# Altium PCB CP100-(5V1A)_Weld_V1.0.PcbDoc
Units mm, origin at the board's own origin, x right, y up, seen from the top; angles counter-clockwise.
Board outline 28 x 43 mm, 2 copper layers (Top Layer, Bottom Layer); 13 components, 13 nets, 42 pads, 0 vias.
Unrouted connection lines stored in the file: 26.
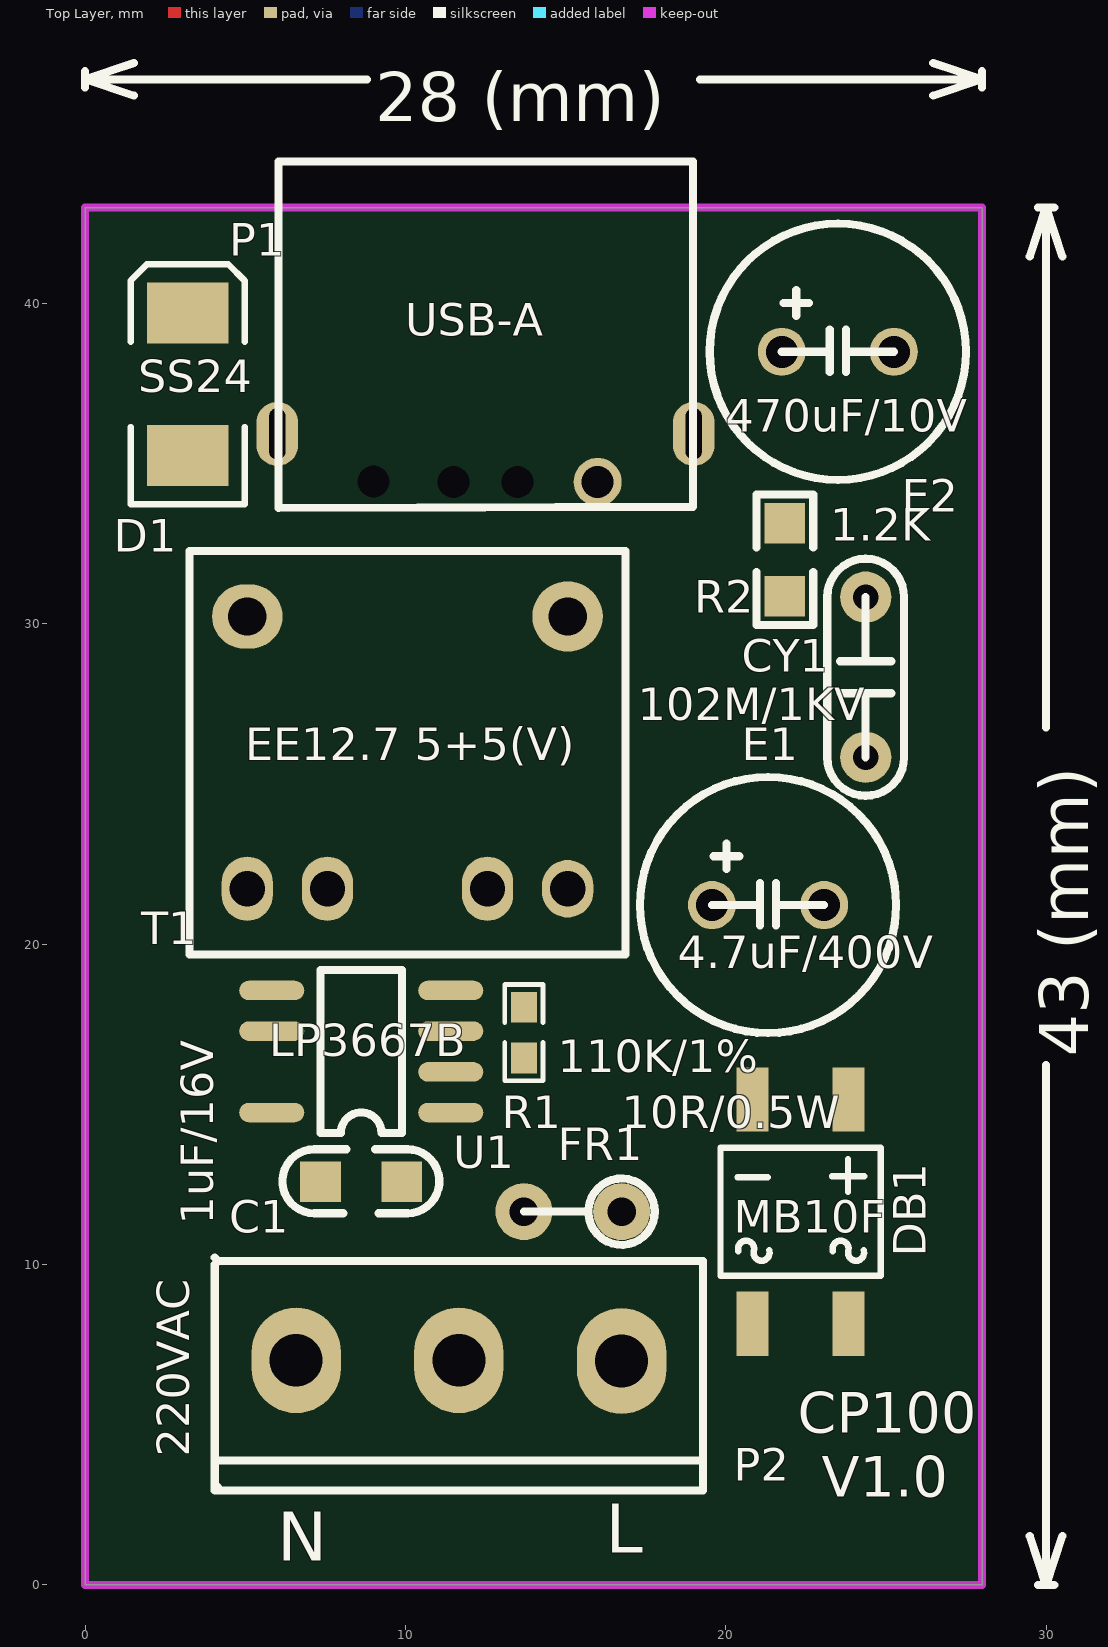
[diagram p0: Top Layer view]
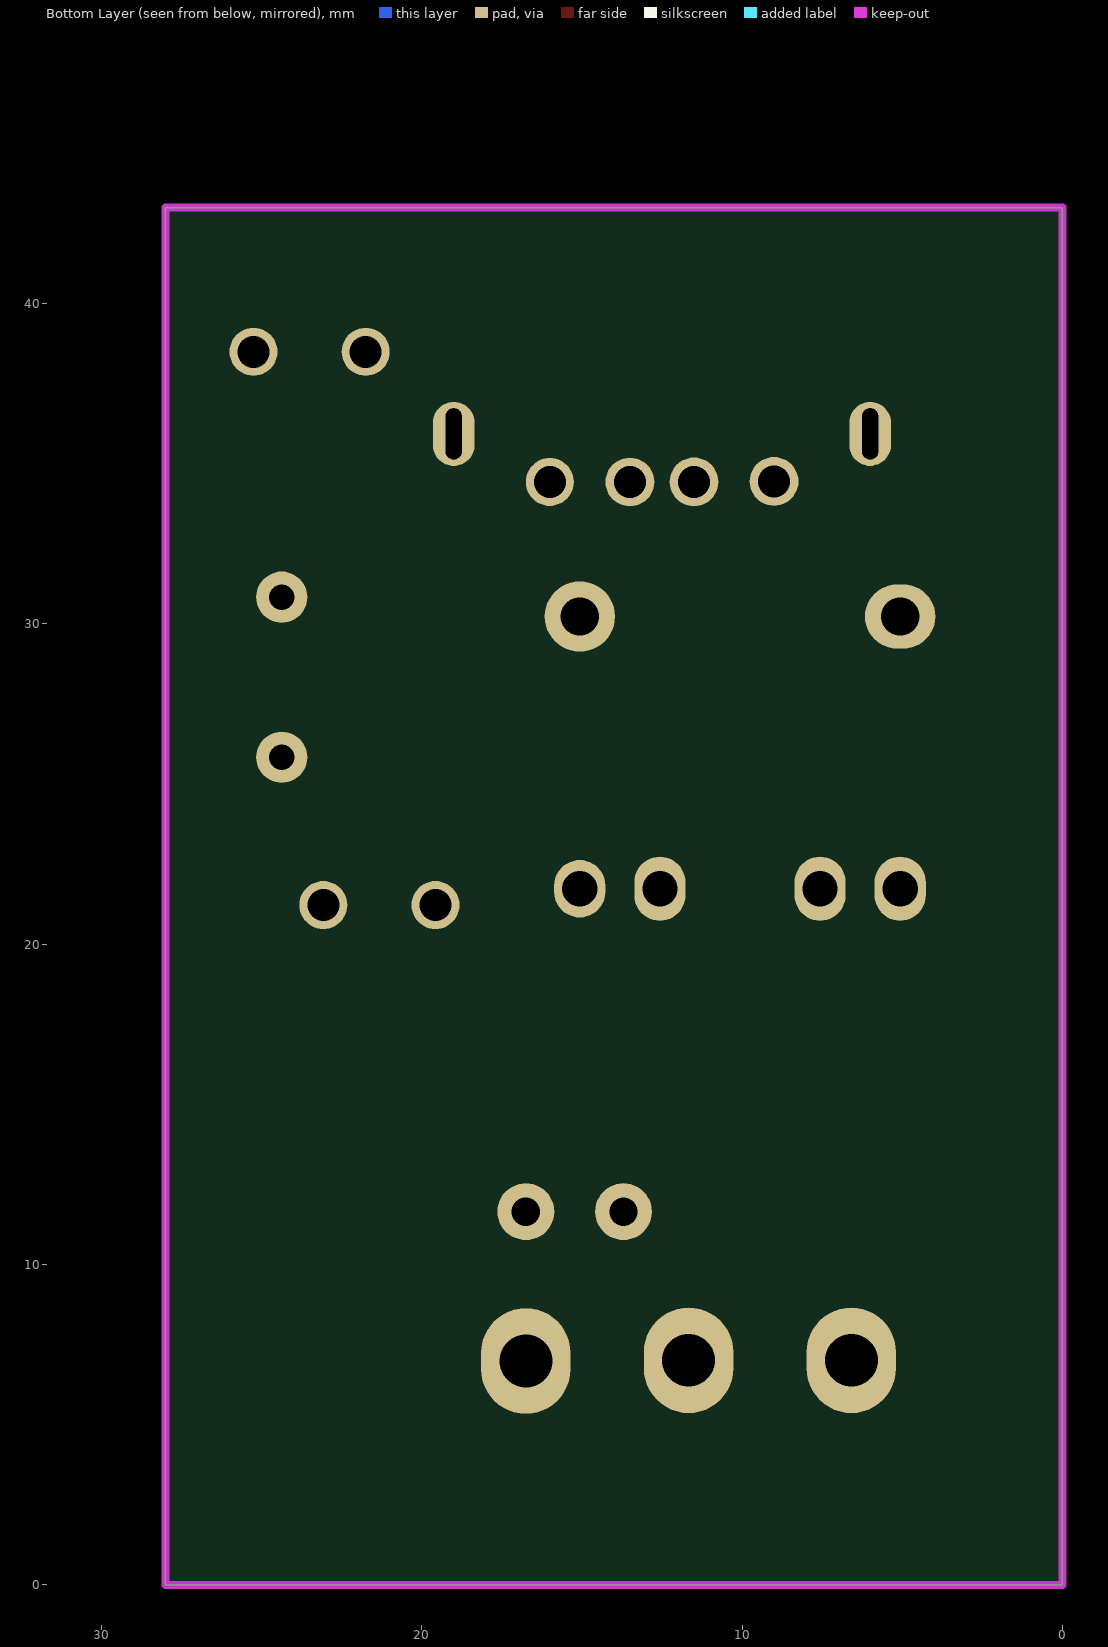
[diagram p1: Bottom Layer view, seen from below]

## Layer stack, top to bottom
Top Layer: signal copper 0.0356
Dielectric: dielectric 0.32, FR-4, Dk 4.8
Bottom Layer: signal copper 0.0356

## Board outline
0,0 0,43 28,43 28,0

## Design rules (kind name [scope] priority, off if disabled: settings)
Clearance "All to Keep-Out Layer" [All vs OnLayer('Keep-Out Layer')] p1: gap=1
Clearance "GND to 5V" [InNet('GND') vs InNet('5V')] p2: gap=0.762
Clearance "GND to All" [InNet('GND')] p3: gap=0.508
Clearance [All] p4: gap=0.254
HoleSize [All] p1: absolutevalues=TRUE maxlimit=25.4 minlimit=0.025 maxpercent=80.000 minpercent=20.000
MinimumSolderMaskSliver [All] p1: minsoldermaskwidth=0
PlaneConnect [All] p1: planeconnectstyle=Direct reliefexpansion=0.508 reliefentries=4 reliefconductorwidth=0.254 reliefairgap=0.254
PolygonConnect [All] p1: connectstyle=Direct reliefconductorwidth=0.254 reliefentries=4 polygonreliefangle="90 Angle"
RoutingVias [All] p1: holewidth=0.711 width=1.27 viastyle="Through Hole" minholewidth=0.711 minwidth=1.27 maxholewidth=0.711 maxwidth=1.27
SilkToSilkClearance [All] p1: silktosilkclearance=0
SilkscreenOverComponentPads [All] p1: minsilkscreentomaskgap=0
SolderMaskExpansion [All] p1: expansion=0.102
Width [All] p1: maxlimit=254 minlimit=0.254 preferedwidth=0.254
23 further rules are at their usual default settings.

## Components (designator, comment, footprint, x,y, rotation, side; value= is the part's Value field where it differs from the comment)
C1 "1uF/16V" 0805_C 8.62,12.588 r180 top
CY1 "102M/1KV" CY-5MM 24.368,28.336 r90 top
D1 "SS24" DO-214AC(SMA) 3.2,37.48 r270 top
DB1 "MB10F" MB10F 22.336,11.652 r90 top (schematic designator BD1)
E1 "4.7uF/400V" CS_220uF/25V 21.32,21.224 r0 top
E2 "470uF/10V" CS_470uF/16V 23.5,38.496 r0 top
FR1 "10R/0.5W" R0.12L 16.748,11.652 r180 top
P1 "USB-A" USB-AF10.6/90 16,34.432 r180 top locked
P2 "220VAC" KF5.08-3P 11.668,7 r180 top locked
R1 "110K/1%" 0603_RN 13.7,17.24 r90 top
R2 "1.2K" 0805_R 21.844,32.004 r90 top
T1 "EE12.7 5+5(V)" "EE12.7 5+5(V)" 5.064,21.732 r90 top locked
U1 "LP3667B" SOP7 8.62,16.652 r180 top

## Footprints (in the part's own frame and the unit in brackets; to place one, negate y for a bottom-side part, rotate by r counter-clockwise, add the part's x,y. Pads: shape width x height; smd on the part's side, far side on the other; paste and mask are expansions set on the pad)
0603_RN [mm] "SMD Resistor"
  rect 0.96x0.8 smd: 1(-0.79,0) 2(0.79,0)
  silkscreen extent -1.5,-0.6 1.5,0.6
0805_C [mm] "SMD Capacitor"
  rect 1.27x1.27 smd: 1(-1.27,0) 2(1.27,0)
  silkscreen extent -2.44,-1.01 2.46,0.99
0805_R [mil] "SMD Resistor"
  rect 50x50 smd: 1(-45,0) 2(45,0)
  silkscreen extent -80,-35 80,35
CS_220uF/25V [mm] "PTH  Electrolytic  Capacitor"
  round 1.5 hole 1: 1(-1.75,0) 2(1.75,0)
  silkscreen extent -4,-4 4,4
CS_470uF/16V [mm] "PTH  Electrolytic  Capacitor"
  round 1.5 hole 1: 1(-1.75,0) 2(1.75,0)
  silkscreen extent -4,-4 4,4
CY-5MM [mm]
  round 1.6 hole 0.8: 1(-2.5,0) 2(2.5,0)
  silkscreen extent -3.7,-1.2 3.7,1.2
DO-214AC(SMA) [mil] "SMD Diode"
  rect 75x100 smd: A(87.5,0) K(-87.5,0)
  silkscreen extent -147,-70 148,70
"EE12.7 5+5(V)" [mm]
  oval 2x1.6 hole 1.1: 1(0,0) 2(0,-2.5) 4(0,-7.5)
  oval 1.8x1.6 hole 1.1: 5(0,-10)
  round 2.2 hole 1.2: 6(8.5,-10)
  oval 2x2.2 hole 1.2: 10(8.5,0)
  silkscreen extent -2.05,-11.8 10.55,1.8
KF5.08-3P [mil]
  oval 110x130 hole 65: 1(-200,0.5) 2(0,-0.5) 3(200,-0.5)
  silkscreen extent -300,-127 300,160
MB10F [mm]
  rect 2x1 smd: 1(-3.5,1.5) 2(-3.5,-1.5) 3(3.5,-1.5) 4(3.5,1.5)
  silkscreen extent -2,-2.5 2,2.5
R0.12L [mil]
  round 70 hole 35: 1(0,0) 2(120,0)
  silkscreen extent -41,-41 120,41
SOP7 [mil]
  oval 80x24 smd: 1(-110,75) 2(-110,25) 3(-110,-25) 4(-110,-75) 5(110,-75) 6(110,-25) 7(110,75)
  silkscreen extent -50,-100 50,100
USB-AF10.6/90 [mm]
  round 1.5 hole 1: 1(0,0)
  round 0 / inner round 1.524 / far side round 1.524 hole 1: 2(2.5,0) 3(4.5,-0.003) 4(7,-0.018)
  oval 1.3x2 hole 0.5 slot 1.6 at 90 deg: 5(-3,-1.5) 5(10,-1.5)
  silkscreen extent -2.98,-10 9.97,0.81

## Part data
C1 CY1: library part Cap1
D1: library part Diode-A, "SS14,SS24,SS34,M7"
E1 E2: library part "Cap Pol1"
FR1 R1 R2: library part Res1
P2: library part "Header 3", "Header, 3-Pin"
U1: "LP3667A, LP3667B, LP3667AH, LP3667BH"

## Nets (pads, with @x,y where several pads share a name; then routed paths per layer and width w, separated by ;. In a path a pad name is that pad's centre, name@x,y a point inside that pad or via, vN(x,y) a via of type N, cw(c..) or ccw(c..) an arc to the next point about the centre after c; other vN are vias at no path point)
+5V: D1.K E2.1 P1.1 R2.2
GND: CY1.2 E2.2 P1.4 P1.5 R2.1 T1.6
GND_P: C1.2 CY1.1 DB1.4 E1.2 T1.4 U1.7
L: DB1.1 P2.1
N: FR1.2 P2.3
NetC1_1: C1.1 U1.1
NetD1_A: D1.A T1.10
NetDB1_2: DB1.2 FR1.1
NetDB1_3: DB1.3 E1.1 T1.1
NetP1_2: P1.2 P1.3
NetR1_1: R1.1 U1.2
NetR1_2: R1.2 T1.5
NetT1_2: T1.2 U1.5 U1.6
pads on no net: P2.2 U1.3 U1.4

## Keep-outs
Keep-Out Layer:
  the board outline again, w0.254

## Silkscreen, mask and mechanical layers (free items; w line width, h text height)
Top Overlay:
  lines w0.254: 0,46.746 0,47.254 ; 1.524,46.492 0,47 ; 1.524,47.508 0,47 ; 8.801,47 0,47 ; 19.199,47 28,47 ; 26.476,46.492 28,47 ; 26.476,47.508 28,47 ; 28,46.746 28,47.254 ; 29.492,1.524 30,0 ; 29.492,41.476 30,43 ; 29.746,0 30.254,0 ; 29.746,43 30.254,43 ; 30,16.236 30,0 ; 30,26.764 30,43 ; 30.508,1.524 30,0 ; 30.508,41.476 30,43
  text "28 (mm)" at 9.055,45.687 h1.52
  text "43 (mm)" at 31.313,16.49 h1.52 r90
  text "CP100" at 22.25,4.75 h1.27
  text "V1.0" at 23,2.75 h1.27
  text "L" at 16.25,1 h1.52
  text "N" at 6,0.75 h1.52